# Altium PCB 上板2020-03-20.PCBDOC
Units mm, origin at the board's own origin, x right, y up, seen from the top; angles counter-clockwise.
Board outline 266 x 71.5 mm, 2 copper layers (Top Layer, Bottom Layer); 7 components, 81 nets, 242 pads, 0 vias.
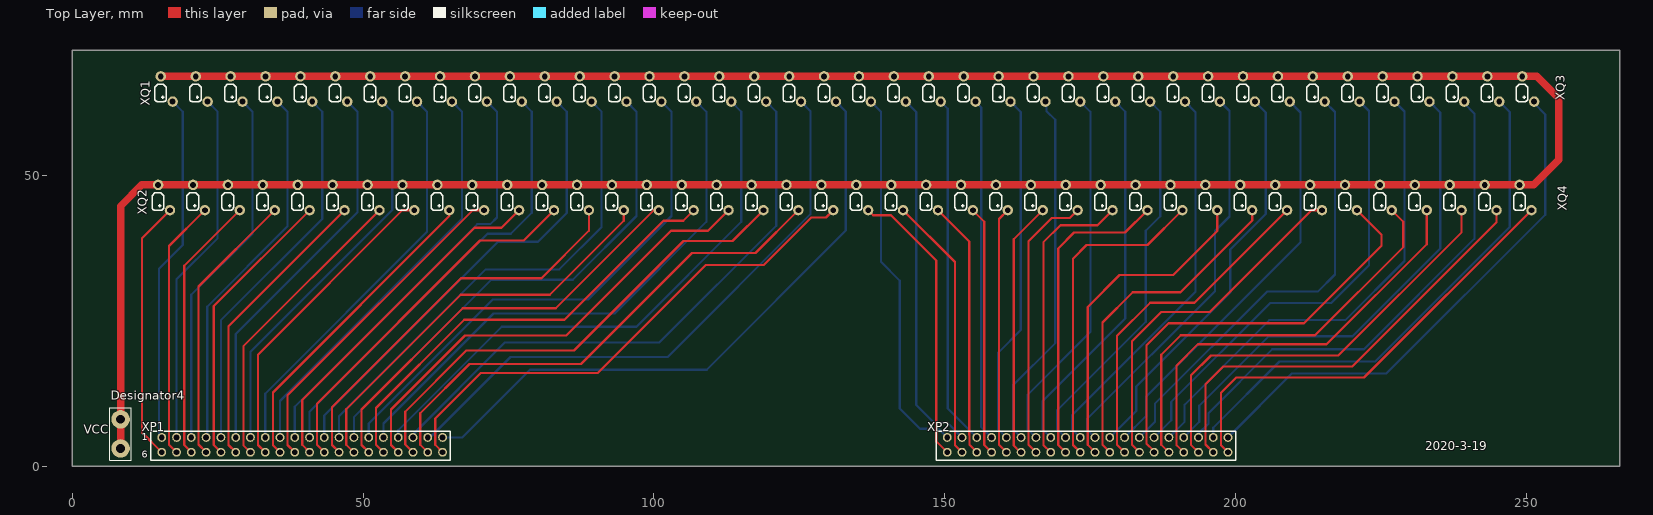
[diagram p0: Top Layer view]
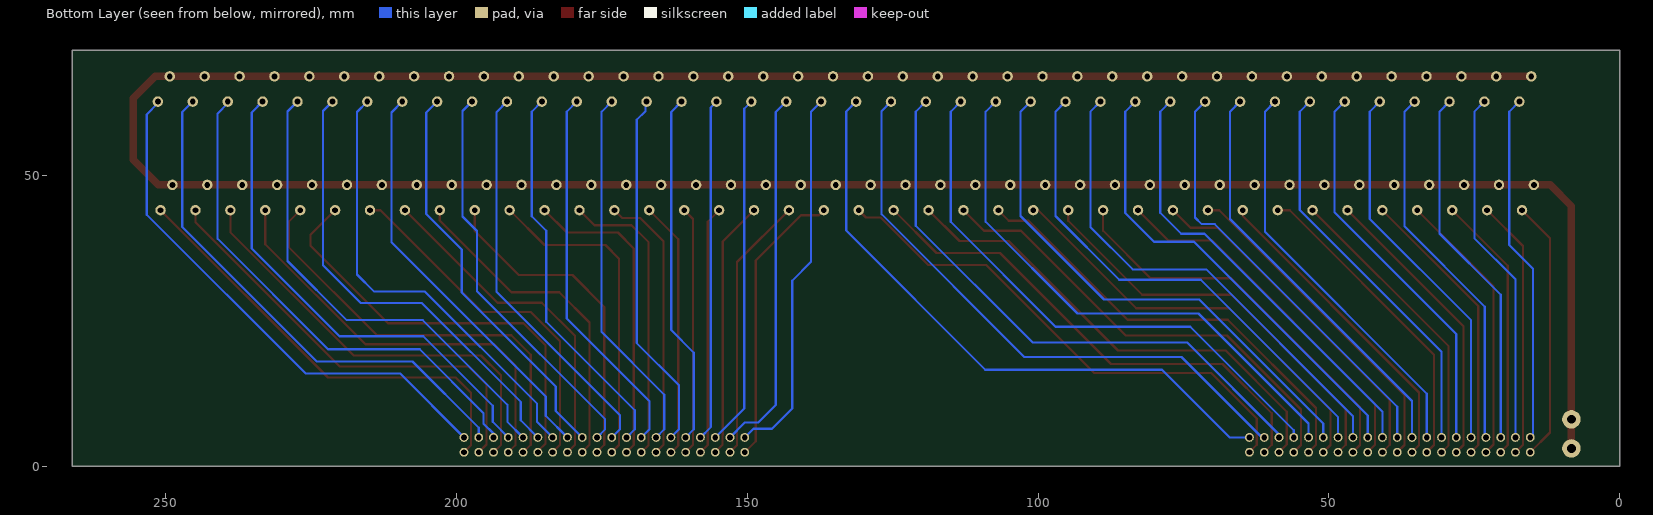
[diagram p1: Bottom Layer view, seen from below]

## Layer stack, top to bottom
Top Solder: solder mask 0.0102, Solder Resist, Dk 3.5
Top Layer: signal copper 0.0356
Dielectric1: dielectric 0.32, FR-4, Dk 4.8
Bottom Layer: signal copper 0.0356
Bottom Solder: solder mask 0.0102, Solder Resist, Dk 3.5

## Board outline
0,0 0,71.5 266,71.5 266,0

## Design rules (kind name [scope] priority, off if disabled: settings)
Clearance [All] p1: gap=0.254 ignorepadtopadclearanceinfootprint=FALSE
DiffPairsRouting [All] p1: maxlimit=0.254 minlimit=0.254 mostfreqgap=0.254 toplayer_minwidth=0.381 toplayer_maxwidth=4 toplayer_prefwidth=0.381 bottomlayer_minwidth=0.381 bottomlayer_maxwidth=4 bottomlayer_prefwidth=0.381 maxuncoupledlength=12.7
FabricationTestPointUsage TestPointUsage [All] p1: valid=0 allowmultiple=FALSE
FabricationTestpoint Testpoint [All] p1: side=3 testpointundercomponent=TRUE minsize=1.016 maxsize=2.54 preferedsize=1.524 minholesize=0 maxholesize=1.016 preferedholesize=0.813 testpointgrid=0.025 allowsidetop=TRUE allowsidebottom=TRUE usegrid=TRUE gridtolerance=0
PolygonConnect [All] p1: connectstyle=Relief reliefconductorwidth=0.254 reliefentries=4 polygonreliefangle="90 Angle" airgapwidth=0.254
RoutingLayers [All] p1: top layer_v5=FALSE bottom layer_v5=TRUE
RoutingVias [All] p1: holewidth=0.8 width=1.6 viastyle="Through Hole" minholewidth=0.711 minwidth=1.27 maxholewidth=0.711 maxwidth=1.27
SilkToSolderMaskClearance SilkscreenOverComponentPads [IsPad] p1: minsilkscreentomaskgap=0.254 clearancetoexposedcopper=TRUE
SolderMaskExpansion [All] p1: expansion=0.102 istentingtop=FALSE
Width [All] p1: maxlimit=1.27 minlimit=0.254 preferedwidth=0.381 minimp=50.000000 maximp=50.000000 favimp=50.000000
25 further rules are at their usual default settings.

## Classes and differential pairs
component class 盲文原理图1: XP2 XQ1 XQ2

## Components (designator, comment, footprint, x,y, rotation, side; value= is the part's Value field where it differs from the comment)
Designator4 "Comment" N1A 6.5,1 r0 top
XP1 "Header 21X2" XINPIAN 13.5,1 r180 top (schematic designator XP)
XP2 "Header 21X2" XINPIAN 148.5,1 r180 top (schematic designator XP)
XQ1 "Header 20X2" XIANQUAN1 131.271,62.66 r180 top
XQ2 "Header 20X2" XIANQUAN1 130.809,44 r180 top
XQ3 "Comment" XIANQUAN40-80 251.271,62.66 r180 top
XQ4 "Comment" XIANQUAN40-80 250.809,44 r180 top

## Footprints (in the part's own frame and the unit in brackets; to place one, negate y for a bottom-side part, rotate by r counter-clockwise, add the part's x,y. Pads: shape width x height; smd on the part's side, far side on the other; paste and mask are expansions set on the pad)
N1A [mm]
  round 3.175 hole 1.5: 1(1.825,2.05) 2(1.825,7.05)
  silkscreen extent 0,0 3.65,9
XIANQUAN1 [mm]
  round 1.8 hole 1: 1(2.04,-4.34) 2(0,0) 3(8.04,-4.34) 4(6,0) 5(14.04,-4.34) 6(12,0) 7(20.04,-4.34) 8(18,0) 9(26.04,-4.34) 10(24,0) 11(32.04,-4.34) 12(30,0) 13(38.04,-4.34) 14(36,0) 15(44.04,-4.34) 16(42,0) 17(50.04,-4.34) 18(48,0) 19(56.04,-4.34) 20(54,0) 21(62.04,-4.34) 22(60,0) 23(68.04,-4.34) 24(66,0) 25(74.04,-4.34) 26(72,0) 27(80.04,-4.34) 28(78,0) 29(86.04,-4.34) 30(84,0) 31(92.04,-4.34) 32(90,0) 33(98.04,-4.34) 34(96,0) 35(104.04,-4.34) 36(102,0) 37(110.04,-4.34) 38(108,0) 39(116.04,-4.34) 40(114,0)
  silkscreen extent 1.08,-3 117.08,0
XIANQUAN40-80 [mm]
  round 1.8 hole 1: 41(2.04,-4.34) 42(0,0) 43(8.04,-4.34) 44(6,0) 45(14.04,-4.34) 46(12,0) 47(20.04,-4.34) 48(18,0) 49(26.04,-4.34) 50(24,0) 51(32.04,-4.34) 52(30,0) 53(38.04,-4.34) 54(36,0) 55(44.04,-4.34) 56(42,0) 57(50.04,-4.34) 58(48,0) 59(56.04,-4.34) 60(54,0) 61(62.04,-4.34) 62(60,0) 63(68.04,-4.34) 64(66,0) 65(74.04,-4.34) 66(72,0) 67(80.04,-4.34) 68(78,0) 69(86.04,-4.34) 70(84,0) 71(92.04,-4.34) 72(90,0) 73(98.04,-4.34) 74(96,0) 75(104.04,-4.34) 76(102,0) 77(110.04,-4.34) 78(108,0) 79(116.04,-4.34) 80(114,0)
  silkscreen extent 1.08,-3 117.08,0
XINPIAN [mm]
  round 1.524 hole 1: 1(-1.9,-3.94) 2(-4.44,-3.94) 3(-6.98,-3.94) 4(-9.52,-3.94) 5(-12.06,-3.94) 6(-14.6,-3.94) 7(-17.14,-3.94) 8(-19.68,-3.94) 9(-22.22,-3.94) 10(-24.76,-3.94) 11(-27.3,-3.94) 12(-29.84,-3.94) 13(-32.38,-3.94) 14(-34.92,-3.94) 15(-37.46,-3.94) 16(-40,-3.94) 17(-42.54,-3.94) 18(-45.08,-3.94) 19(-47.62,-3.94) 20(-50.16,-3.94) 21(-50.16,-1.4) 22(-47.62,-1.4) 23(-45.08,-1.4) 24(-42.54,-1.4) 25(-40,-1.4) 26(-37.46,-1.4) 27(-34.92,-1.4) 28(-32.38,-1.4) 29(-29.84,-1.4) 30(-27.3,-1.4) 31(-24.76,-1.4) 32(-22.22,-1.4) 33(-19.68,-1.4) 34(-17.14,-1.4) 35(-14.6,-1.4) 36(-12.06,-1.4) 37(-9.52,-1.4) 38(-6.98,-1.4) 39(-4.44,-1.4) 40(-1.9,-1.4)
  silkscreen extent -51.5,-5 0,0

## Part data
XP1 XP2: library part "Header 22X2", "Header, 22-Pin, Dual row"
XQ1 XQ2: "Header, 20-Pin, Dual row"

## Nets (pads, with @x,y where several pads share a name; then routed paths per layer and width w, separated by ;. In a path a pad name is that pad's centre, name@x,y a point inside that pad or via, vN(x,y) a via of type N, cw(c..) or ccw(c..) an arc to the next point about the centre after c; other vN are vias at no path point)
GND: Designator4.1 Designator4.2 XQ1.1 XQ1.3 XQ1.5 XQ1.7 XQ1.9 XQ1.11 XQ1.13 XQ1.15 XQ1.17 XQ1.19 XQ1.21 XQ1.23 XQ1.25 XQ1.27 XQ1.29 XQ1.31 XQ1.33 XQ1.35 XQ1.37 XQ1.39 XQ2.1 XQ2.3 XQ2.5 XQ2.7 XQ2.9 XQ2.11 XQ2.13 XQ2.15 XQ2.17 XQ2.19 XQ2.21 XQ2.23 XQ2.25 XQ2.27 XQ2.29 XQ2.31 XQ2.33 XQ2.35 XQ2.37 XQ2.39 XQ3.41 XQ3.43 XQ3.45 XQ3.47 XQ3.49 XQ3.51 XQ3.53 XQ3.55 XQ3.57 XQ3.59 XQ3.61 XQ3.63 XQ3.65 XQ3.67 XQ3.69 XQ3.71 XQ3.73 XQ3.75 XQ3.77 XQ3.79 XQ4.41 XQ4.43 XQ4.45 XQ4.47 XQ4.49 XQ4.51 XQ4.53 XQ4.55 XQ4.57 XQ4.59 XQ4.61 XQ4.63 XQ4.65 XQ4.67 XQ4.69 XQ4.71 XQ4.73 XQ4.75 XQ4.77 XQ4.79 | length 544.6
  Top Layer w1.27: Designator4.1 Designator4.2 8.325,44.725 11.94,48.34 XQ2.37 XQ2.35 XQ2.29 XQ2.27 XQ2.19 XQ2.17 XQ2.11 XQ2.9 XQ2.5 XQ2.1 XQ4.79 XQ4.73 XQ4.67 XQ4.65 XQ4.63 XQ4.61 XQ4.57 XQ4.55 XQ4.49 XQ4.47 XQ4.45 XQ4.43 XQ4.41 251.215,48.34 255.525,52.65 255.525,63.225 251.75,67 XQ3.41 XQ3.43 XQ3.45 XQ3.47 XQ3.49 XQ3.51 XQ3.53 XQ3.55 XQ3.57 XQ3.59 XQ3.61 XQ3.63 XQ3.65 XQ3.67 XQ3.69 XQ3.71 XQ3.73 XQ3.75 XQ3.77 XQ3.79 XQ1.1 XQ1.3 XQ1.5 XQ1.7 XQ1.9 XQ1.11 XQ1.13 XQ1.15 XQ1.17 XQ1.19 XQ1.21 XQ1.23 XQ1.25 XQ1.27 XQ1.29 XQ1.31 XQ1.33 XQ1.35 XQ1.37 XQ1.39
XQ1_1: XP1.20 XQ1.2 | length 106.9
  Bottom Layer w0.381: XP1.20 67.04,4.94 78.675,16.575 109.05,16.575 132.975,40.5 132.975,60.956 XQ1.2
XQ1_2: XP1.19 XQ1.4 | length 101.7
  Bottom Layer w0.381: XP1.19 61.49,4.94 75.325,18.775 102.35,18.775 126.875,43.3 126.875,61.056 XQ1.4
XQ1_3: XP1.18 XQ1.6 | length 99.8
  Bottom Layer w0.381: XP1.18 58.58,5.455 74.4,21.275 100.95,21.275 121,41.325 121,60.931 XQ1.6
XQ1_4: XP1.17 XQ1.8 | length 96.4
  Bottom Layer w0.381: XP1.17 56.04,6.19 73.825,23.975 96.975,23.975 115,42 115,60.931 XQ1.8
XQ1_5: XP1.16 XQ1.10 | length 93.6
  Bottom Layer w0.381: XP1.16 53.5,7.325 72.4,26.225 93.225,26.225 109,42 109,60.931 XQ1.10
XQ1_6: XP1.15 XQ1.12 | length 89.6
  Bottom Layer w0.381: XP1.15 50.96,7.335 72.275,28.65 88.65,28.65 103,43 103,60.931 XQ1.12
XQ1_7: XP1.14 XQ1.14 | length 86.8
  Bottom Layer w0.381: XP1.14 48.42,8.42 72.025,32.025 86.025,32.025 97,43 97,60.931 XQ1.14
XQ1_8: XP1.13 XQ1.16 | length 84.5
  Bottom Layer w0.381: XP1.13 45.88,8.609 71.096,33.825 83.725,33.825 91,41.1 91,60.931 XQ1.16
XQ1_9: XP1.12 XQ1.18 | length 79.7
  Bottom Layer w0.381: XP1.12 43.34,8.715 73.2,38.575 80.075,38.575 85,43.5 85,60.931 XQ1.18 XQ1.18@83.25,62.66
XQ1_10: XP1.11 XQ1.20 | length 76.6
  Bottom Layer w0.381: XP1.11 40.8,9.375 71.375,39.95 75.4,39.95 79,43.55 79,60.931 XQ1.20
XQ1_11: XP1.10 XQ1.22 | length 74.1
  Bottom Layer w0.381: XP1.10 38.26,10.235 69.625,41.6 71.875,41.6 73,42.725 73,60.931 XQ1.22
XQ1_12: XP1.9 XQ1.24 | length 71.4
  Bottom Layer w0.381: XP1.9 35.72,11.22 64.5,40 67,42.5 67,60.931 XQ1.24
XQ1_13: XP1.8 XQ1.26 | length 70
  Bottom Layer w0.381: XP1.8 33.18,12.455 61,40.275 61,60.931 XQ1.26
XQ1_14: XP1.7 XQ1.28 | length 68.5
  Bottom Layer w0.381: XP1.7 30.64,19.665 55,44.025 55,60.931 XQ1.28
XQ1_15: XP1.6 XQ1.30 | length 67.1
  Bottom Layer w0.381: XP1.6 28.1,22.725 49.025,43.65 49.025,60.906 XQ1.30
XQ1_16: XP1.5 XQ1.32 | length 65.7
  Bottom Layer w0.381: XP1.5 25.56,25.06 43,42.5 43,60.931 XQ1.32
XQ1_17: XP1.4 XQ1.34 | length 64.2
  Bottom Layer w0.381: XP1.4 23.2,5.12 23.2,27.425 37,41.225 37,60.931 XQ1.34
XQ1_18: XP1.3 XQ1.36 | length 62.8
  Bottom Layer w0.381: XP1.3 20.48,29.48 31,40 31,60.931 XQ1.36
XQ1_19: XP1.2 XQ1.38 | length 61.4
  Bottom Layer w0.381: XP1.2 17.94,32.115 25,39.175 25,60.931 XQ1.38
XQ1_20: XP1.1 XQ1.40 | length 60.3
  Bottom Layer w0.381: XP1.1 14.9,5.44 14.9,33.9 19,38 19,60.931 XQ1.40
XQ2_1: XP1.21 XQ2.2 | length 89.6
  Top Layer w0.381: XP1.21 62.4,3.66 62.4,8.2 70.2,16 90.35,16 108.95,34.6 118.9,34.6 127.05,42.75 129.559,42.75 XQ2.2
XQ2_2: XP1.22 XQ2.4 | length 86.7
  Top Layer w0.381: XP1.22 59.825,3.695 59.825,9.1 68.3,17.575 87.45,17.575 106.525,36.65 117.459,36.65 XQ2.4
XQ2_3: XP1.23 XQ2.6 | length 83.6
  Top Layer w0.381: XP1.23@58.18,2 XP1.23@58.18,2.18 ; XP1.23 57.25,3.73 57.25,9.375 67.75,19.875 86.25,19.875 105.075,38.7 113.509,38.7 XQ2.6
XQ2_4: XP1.24 XQ2.8 | length 80.1
  Top Layer w0.381: XP1.24 54.8,3.64 54.8,9.75 67.5,22.45 84.925,22.45 102.934,40.459 109.268,40.459 XQ2.8
XQ2_5: XP1.25 XQ2.10 | length 76.8
  Top Layer w0.381: XP1.25 52.225,3.675 52.225,10 67.4,25.175 84.625,25.175 101.65,42.2 105.009,42.2 XQ2.10
XQ2_6: XP1.26 XQ2.12 | length 73.1
  Top Layer w0.381: XP1.26 49.725,3.635 49.725,9.725 67.125,27.125 83.1,27.125 99.975,44 XQ2.12
XQ2_7: XP1.27 XQ2.14 | length 70.9
  Top Layer w0.381: XP1.27 47.125,3.695 47.125,9.775 66.8,29.45 82.1,29.45 94.809,42.159 XQ2.14
XQ2_8: XP1.28 XQ2.16 | length 68.5
  Top Layer w0.381: XP1.28 44.65,3.63 44.65,10.125 66.825,32.3 80.65,32.3 88.809,40.459 XQ2.16
XQ2_9: XP1.29 XQ2.18 | length 63.4
  Top Layer w0.381: XP1.29 42.075,3.665 42.075,10.75 70.109,38.784 77.593,38.784 XQ2.18
XQ2_10: XP1.30 XQ2.20 | length 60.8
  Top Layer w0.381: XP1.30@40.4,2 XP1.30 40.8,2.435 39.55,3.685 39.55,11.375 69.15,40.975 73.784,40.975 XQ2.20
XQ2_11: XP1.31 XQ2.22 | length 57.3
  Top Layer w0.381: XP1.31@37.86,2 XP1.31@37.86,2.035 ; XP1.31 37.025,3.635 37.025,12.175 68.85,44 XQ2.22
XQ2_12: XP1.32 XQ2.24 | length 54.7
  Top Layer w0.381: XP1.32 34.5,3.62 34.5,12.675 64.809,42.984 XQ2.24
XQ2_13: XP1.33 XQ2.26 | length 54.5
  Top Layer w0.381: XP1.33 31.925,3.655 31.925,19.175 56.75,44 XQ2.26
XQ2_14: XP1.34 XQ2.28 | length 51.8
  Top Layer w0.381: XP1.34 29.425,3.615 29.425,20.616 XQ2.28
XQ2_15: XP1.35 XQ2.30 | length 50.4
  Top Layer w0.381: XP1.35 26.875,3.625 26.875,24.066 XQ2.30
XQ2_16: XP1.36 XQ2.32 | length 48.9
  Top Layer w0.381: XP1.36 24.325,3.635 24.325,27.516 XQ2.32
XQ2_17: XP1.37 XQ2.34 | length 47.6
  Top Layer w0.381: XP1.37 21.7,3.72 21.7,30.891 XQ2.34
XQ2_18: XP1.38 XQ2.36 | length 46.1
  Top Layer w0.381: XP1.38 19.25,3.63 19.25,34.441 XQ2.36 ; XQ2.36@29.214,44 XQ2.36@29.249,44
XQ2_19: XP1.39 XQ2.38 | length 44.7
  Top Layer w0.381: XP1.39 16.65,3.69 16.65,37.841 XQ2.38
XQ2_20: XP1.40 XQ2.40 | length 45
  Top Layer w0.381: XP1.40 12,5.8 12,39.191 XQ2.40
XQ3_1: XP2.21 XQ4.42 | length 77.1
  Top Layer w0.381: XP2.21 197.45,3.61 197.45,12.625 200.05,15.225 222.034,15.225 XQ4.42
XQ3_2: XP2.22 XQ4.44 | length 76.1
  Top Layer w0.381: XP2.22 194.8,3.72 194.8,14.1 197.85,17.15 220.025,17.15 244.809,41.934 XQ4.44
  Bottom Layer w0.381: XQ4.44@244.65,43.841 XQ4.44
XQ3_3: XP2.23 XQ4.46 | length 74.2
  Top Layer w0.381: XP2.23 192.275,3.705 192.275,15.575 195.725,19.025 217.625,19.025 238.809,40.209 XQ4.46
XQ3_4: XP2.24 XQ4.48 | length 72.9
  Top Layer w0.381: XP2.24 189.825,3.615 189.825,17.3 193.475,20.95 215.6,20.95 232.809,38.159 XQ4.48
XQ3_5: XP2.25 XQ4.50 | length 73.7
  Top Layer w0.381: XP2.25 187.2,3.7 187.2,19.175 190.525,22.5 213.625,22.5 228.775,37.65 228.775,42.034 XQ4.50
XQ3_6: XP2.26 XQ4.52 | length 73.9
  Top Layer w0.381: XP2.26@185.788,2.728 184.65,3.866 184.65,20.8 188.425,24.575 211.725,24.575 225.05,37.9 225.05,39.759 XQ4.52
XQ3_7: XP2.27 XQ4.54 | length 61.9
  Top Layer w0.381: XP2.27@183.17,2.65 XP2.27 182.154,3.666 182.154,4.621 182.15,4.625 182.15,21.475 187.15,26.475 195.475,26.475 213,44 XQ4.54
XQ3_8: XP2.28 XQ4.56 | length 58.8
  Top Layer w0.381: XP2.28@180.88,2.52 XP2.28 179.575,3.705 179.575,22.4 185.275,28.1 192.909,28.1 XQ4.56
XQ3_9: XP2.29 XQ4.58 | length 57.6
  Top Layer w0.381: XP2.29 177.075,3.665 177.075,24.7 182.275,29.9 190.475,29.9 202.809,42.234 XQ4.58
XQ3_10: XP2.30 XQ4.60 | length 56.8
  Top Layer w0.381: XP2.30 174.534,3.666 174.534,27.359 180.025,32.85 189.25,32.85 196.809,40.409 XQ4.60
XQ3_11: XP2.31 XQ4.62 | length 56.1
  Top Layer w0.381: XP2.31 173.25,2.4 172,3.65 172,35.675 174.35,38.025 184.834,38.025 XQ4.62
XQ3_12: XP2.32 XQ4.64 | length 53.6
  Top Layer w0.381: XP2.32 169.475,3.645 169.475,37.425 172.2,40.15 180.959,40.15 XQ4.64
XQ3_13: XP2.33 XQ4.66 | length 50.8
  Top Layer w0.381: XP2.33 166.925,3.655 166.925,38.475 169.875,41.425 176.234,41.425 XQ4.66
XQ3_14: XP2.34 XQ4.68 | length 47.4
  Top Layer w0.381: XP2.34 164.366,3.674 164.366,6.659 164.366,38.666 168.35,42.65 171.459,42.65 XQ4.68
XQ3_15: XP2.35 XQ4.70 | length 44.4
  Top Layer w0.381: XP2.35 162.97,2.4 161.825,3.545 161.825,4.25 161.825,39.016 XQ4.70
  Bottom Layer w0.381: XQ4.70 XQ4.70@166.809,44.159
XQ3_16: XP2.36 XQ4.72 | length 42.9
  Top Layer w0.381: XP2.36@160.4,2.4 XP2.36 159.294,3.666 159.294,5.276 159.286,5.284 159.286,8.664 159.286,30.514 159.286,42.477 XQ4.72
XQ3_17: XP2.37 XQ4.74 | length 42.9
  Top Layer w0.381: XQ4.74 156.775,42.034 156.775,31.025 156.775,6.8 156.775,3.645 XP2.37
XQ3_18: XP2.38 XQ4.76 | length 44.4
  Top Layer w0.381: XQ4.76 154.2,38.609 154.2,30.7 154.2,7.4 154.2,5.34 154.214,5.326 154.214,3.666 XP2.38
XQ3_19: XP2.39 XQ4.78 | length 46.2
  Top Layer w0.381: XQ4.78 151.725,35.084 151.725,3.615 XP2.39 XP2.39@152.81,2.4 ; XP2.39@152.885,2.345 XP2.39@153.08,2.15
XQ3_20: XP2.40 XQ4.80 | length 49.4
  Top Layer w0.381: XQ4.80 137.684,43.125 140.725,43.125 148.5,35.35 148.5,4.3 XP2.40
  Bottom Layer w0.381: XQ4.80@136.425,44 XQ4.80
XQ4_1: XP2.20 XQ3.42 | length 90.6
  Bottom Layer w0.381: XP2.20 209.67,15.95 225.9,15.95 253.175,43.225 253.175,60.45 251.271,62.354 XQ3.42
XQ4_2: XP2.19 XQ3.44 | length 89.2
  Bottom Layer w0.381: XP2.19 196.12,6.595 207.5,17.975 223.95,17.975 247.075,41.1 247.075,60.856 XQ3.44
XQ4_3: XP2.18 XQ3.46 | length 87.3
  Bottom Layer w0.381: XP2.18 193.58,5.605 195.288,7.312 195.288,9.113 206.275,20.1 222.025,20.1 241,39.075 241,60.625 239.271,62.354 XQ3.46
XQ4_4: XP2.17 XQ3.48 | length 85.2
  Bottom Layer w0.381: XP2.17 193.725,7.625 193.725,10.375 205.675,22.325 220.05,22.325 235.125,37.4 235.125,60.806 XQ3.48
XQ4_5: XP2.16 XQ3.50 | length 82.9
  Bottom Layer w0.381: XP2.16 191.2,7.64 191.2,10.575 205.725,25.1 218.825,25.1 228.975,35.25 228.975,60.956 XQ3.50
XQ4_6: XP2.15 XQ3.52 | length 79.8
  Bottom Layer w0.381: XP2.15 188.897,7.877 188.897,11.053 205.87,28.025 216.375,28.025 222.875,34.525 222.875,61.056 XQ3.52
XQ4_7: XP2.14 XQ3.54 | length 77.5
  Bottom Layer w0.381: XP2.14 186.087,7.607 186.087,10.737 205.35,30 214.1,30 217.05,32.95 217.05,60.856 215.271,62.635 XQ3.54
XQ4_8: XP2.13 XQ3.56 | length 71
  Bottom Layer w0.381: XP2.13 184.613,8.672 184.613,11.987 211.125,38.5 211.125,60.806 XQ3.56
XQ4_9: XP2.12 XQ3.58 | length 69.6
  Bottom Layer w0.381: XP2.12 182.888,9.487 182.888,13.712 199.025,29.85 199.025,37.225 205.125,43.325 205.125,60.806 XQ3.58
XQ4_10: XP2.11 XQ3.60 | length 69.1
  Bottom Layer w0.381: XP2.11 174.4,6.34 174.4,8.05 196.425,30.075 196.425,40.425 198.9,42.9 198.9,61.031 XQ3.60
XQ4_11: XP2.10 XQ3.62 | length 67.9
  Bottom Layer w0.381: XP2.10 171.86,6.34 171.86,8.76 193.05,29.95 193.05,60.881 XQ3.62 XQ3.62@191.181,62.571
XQ4_12: XP2.9 XQ3.64 | length 66.3
  Bottom Layer w0.381: XP2.9 169.32,6.34 169.32,9.62 184.525,24.825 184.525,40.475 187,42.95 187,60.931 XQ3.64
XQ4_13: XP2.8 XQ3.66 | length 64.9
  Bottom Layer w0.381: XP2.8 166.78,6.34 166.78,11.155 181,25.375 181,60.931 XQ3.66
XQ4_14: XP2.7 XQ3.68 | length 63.5
  Bottom Layer w0.381: XP2.7 164.24,6.34 164.24,12.29 175,23.05 175,60.931 XQ3.68
XQ4_15: XP2.6 XQ3.70 | length 62
  Bottom Layer w0.381: XP2.6 161.7,6.34 161.7,13.9 168.95,21.15 168.95,59.525 167.465,61.01 167.465,62.466 XQ3.70
XQ4_16: XP2.5 XQ3.72 | length 60.6
  Bottom Layer w0.381: XP2.5 159.16,6.34 159.16,19.51 163.05,23.4 163.05,60.881 XQ3.72
XQ4_17: XP2.4 XQ3.74 | length 58.9
  Bottom Layer w0.381: XQ3.74 155.271,62.633 156.25,61.654 156.25,8.4 156.25,6.71 XP2.4
XQ4_18: XP2.3 XQ3.76 | length 60.3
  Bottom Layer w0.381: XQ3.76 150.5,61.431 150.5,9.92 XP2.3
XQ4_19: XP2.2 XQ3.78 | length 63.1
  Bottom Layer w0.381: XQ3.78 145.075,60.856 145.075,10.505 148.09,7.49 150.39,7.49 XP2.2
XQ4_20: XP2.1 XQ3.80 | length 65
  Bottom Layer w0.381: XQ3.80 139,60.931 139,35.125 142.25,31.875 142.25,9.9 145.714,6.436 148.904,6.436 XP2.1

## Silkscreen, mask and mechanical layers (free items; w line width, h text height)
Top Overlay:
  text "VCC" at 2,5.6 h1.52
  text "1" at 12,4 h2.02
  text "2020-3-19" at 232.525,2.775 h1.52
  text "6" at 12,1 h2.02
Mechanical 1:
  drawing of 498 lines, arcs and shapes, not listed